# Altium PCB PCB.PcbDoc
Units mm, origin at the board's own origin, x right, y up, seen from the top; angles counter-clockwise.
Board outline 40 x 15 mm, 2 copper layers (Top Layer, Bottom Layer); 2 components, 16 nets, 38 pads, 6 vias.
Unrouted connection lines stored in the file: 10.
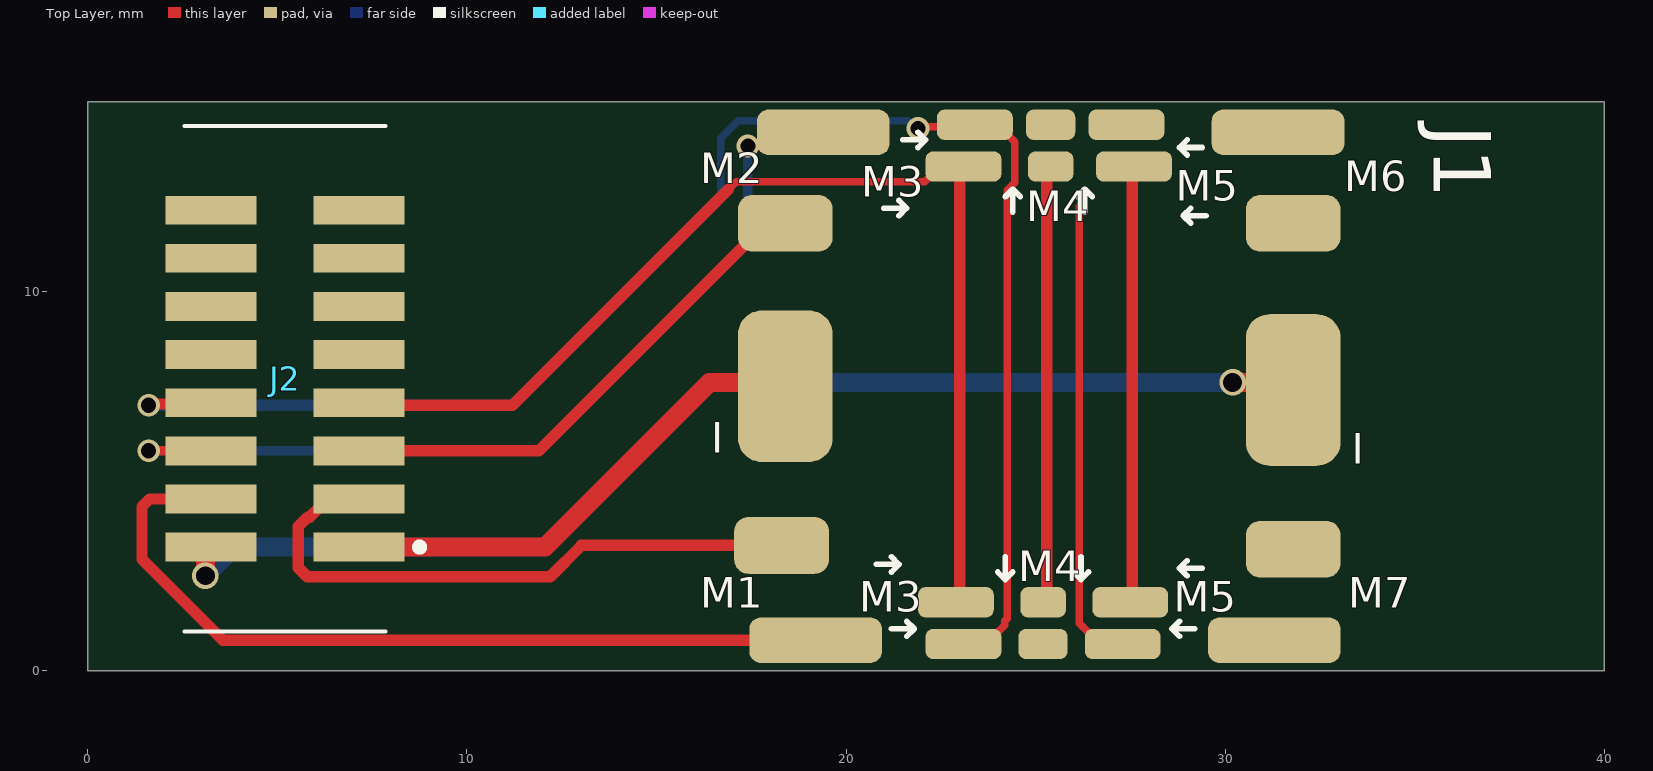
[diagram p0: Top Layer view]
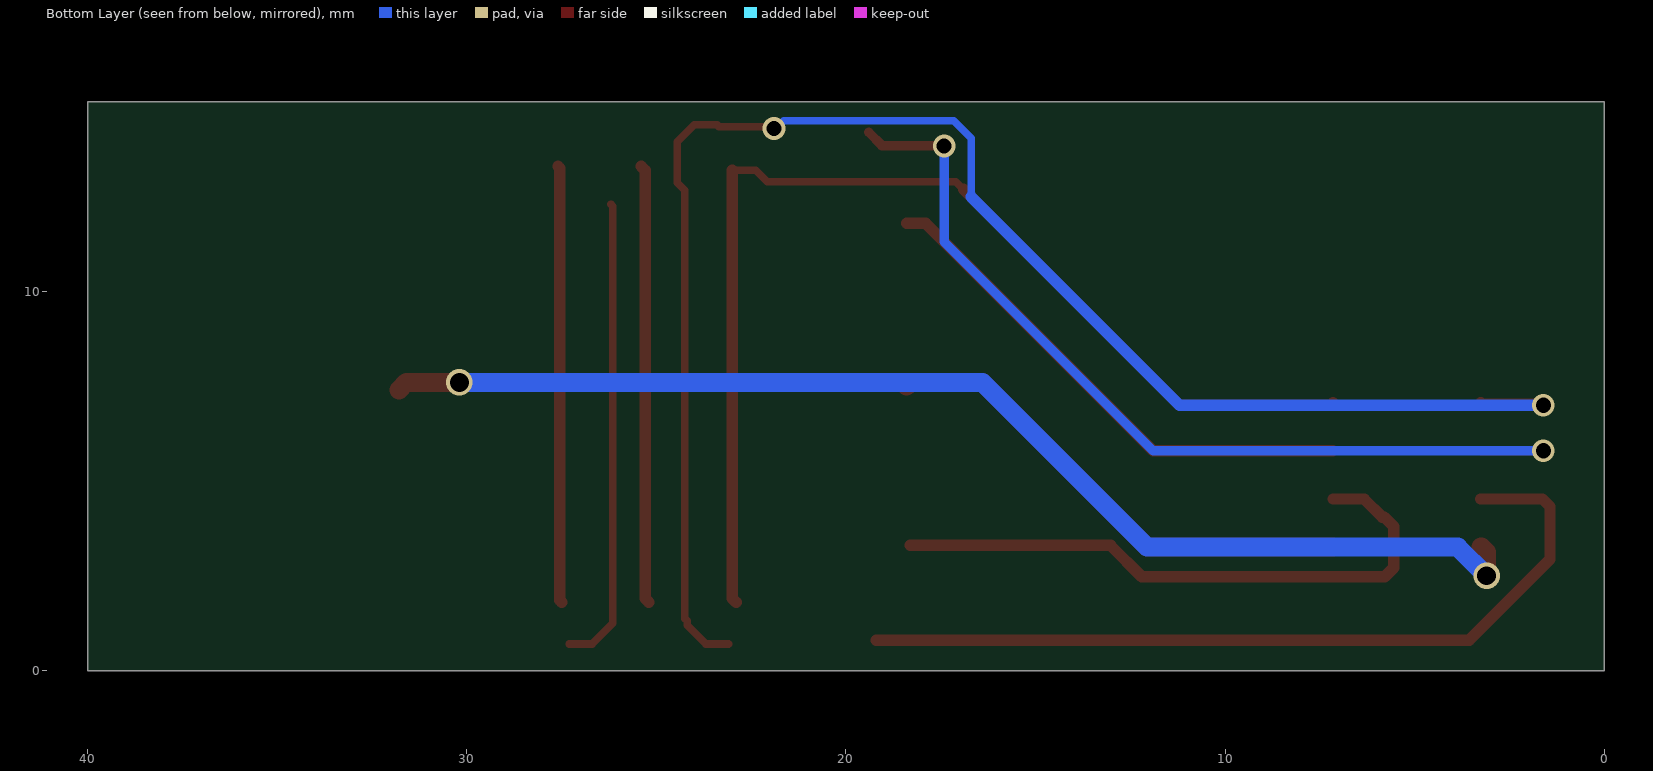
[diagram p1: Bottom Layer view, seen from below]

## Layer stack, top to bottom
Top Solder: solder mask 0.01, Solder Resist, Dk 3.5
Top Layer: signal copper 0.036
Dielectric 1: dielectric 0.32, FR-4, Dk 4.8
Bottom Layer: signal copper 0.036
Bottom Solder: solder mask 0.01, Solder Resist, Dk 3.5

## Board outline
0,0 40,0 40,15 0,15

## Design rules (kind name [scope] priority, off if disabled: settings)
Clearance [All] p1: gap=0.25 ignorepadtopadclearanceinfootprint=FALSE except(0: Arc-Hole Track-Hole SMDPad-Hole THPad-Hole Via-Hole Fill-Hole Poly-Hole Region-Hole Text-Hole)
HoleSize [All] p1: absolutevalues=TRUE maxlimit=6.3 minlimit=0.2 maxpercent=80.000 minpercent=20.000
MinimumAnnularRing [All] p1: minimumring=0.13
PolygonConnect [All] p1: connectstyle=Relief reliefconductorwidth=0.254 reliefentries=4 polygonreliefangle="90 Angle" airgapwidth=0.254
RoutingVias [All] p1: holewidth=0.3 width=0.6 viastyle="Through Hole" minholewidth=0.2 minwidth=0.45 maxholewidth=6.3 maxwidth=6.7
SolderMaskExpansion [All] p1: expansion=0.102 istentingtop=FALSE
Width [All] p1: maxlimit=0.5 minlimit=0.15 preferedwidth=0.3 minimp=50.000000 maximp=50.000000 favimp=50.000000
29 further rules are at their usual default settings.

## Classes and differential pairs
net class [1..16]: 1 2 3 4 5 6 7 8 9 10 11 12 13 14 15 16

## Components (designator, comment, footprint, x,y, rotation, side; value= is the part's Value field where it differs from the comment)
J1 "sample_contact_place" sample 25.1,7.4 r0 top
J2 "20021221-00016C4LF" 2002122100016C4LF 5.2,7.7 r270 top

## Footprints (in the part's own frame and the unit in brackets; to place one, negate y for a bottom-side part, rotate by r counter-clockwise, add the part's x,y. Pads: shape width x height; smd on the part's side, far side on the other; paste and mask are expansions set on the pad)
2002122100016C4LF [mm]
  rect 0.76x2.4 smd: 1(4.445,1.95) 2(4.445,-1.95) 3(3.175,1.95) 4(3.175,-1.95) 5(1.905,1.95) 6(1.905,-1.95) 7(0.635,1.95) 8(0.635,-1.95) 9(-0.635,1.95) 10(-0.635,-1.95) 11(-1.905,1.95) 12(-1.905,-1.95) 13(-3.175,1.95) 14(-3.175,-1.95) 15(-4.445,1.95) 16(-4.445,-1.95)
  silkscreen extent -6.67,-2.65 6.67,3.6, body extent -6.67,-3.07 6.67,3.07, height 5.9
sample [mm]
  rrect50% 2.5x4 smd: 1(-6.7,0.1) 2(6.7,0)
  rrect50% 2.5x1.5 smd: 3(-6.8,-4.1) 5(-6.7,4.4) 14(6.7,4.4) 16(6.7,-4.2)
  rrect50% 3.5x1.2 smd: 4(-5.9,-6.6) 6(-5.7,6.8) 13(6.3,6.8) 15(6.2,-6.6)
  rrect50% 2x0.8 smd: 7(-2.2,-5.6) 7(-2,5.9) 8(-2,-6.7) 8(-1.7,7) 11(2.4,-5.6) 11(2.5,5.9) 12(2.2,-6.7) 12(2.3,7)
  rrect50% 1.2x0.8 smd: 9(0.1,-5.6) 9(0.3,5.9)
  rrect50% 1.3x0.8 smd: 10(0.1,-6.7) 10(0.3,7)
  silkscreen extent -4.3,-6.5 4.4,6.8, body extent -5,-4.9 5,5.1, height 1

## Part data
J2: "Connector", Manufacturer_Name=Amphenol, Height=5.8mm, Manufacturer_Part_Number=20021221-00016C4LF

## Via types
v1: diameter 0.6, hole 0.4, Top Layer to Bottom Layer, 4 vias
v2: diameter 0.7, hole 0.5, Top Layer to Bottom Layer, 2 vias

## Nets (pads, with @x,y where several pads share a name; then routed paths per layer and width w, separated by ;. In a path a pad name is that pad's centre, name@x,y a point inside that pad or via, vN(x,y) a via of type N, cw(c..) or ccw(c..) an arc to the next point about the centre after c; other vN are vias at no path point)
1: J1.1 J2.1 | length 13.1
  Top Layer w0.5: J2.1 12.055,3.255 16.4,7.6 18.3,7.6 J1.1
2: J1.2 J2.2 | length 31.7
  Top Layer w0.5: v2(3.1,2.5) 3.1,3.125 3.23,3.255 J2.2 ; v2(30.2,7.6) 31.6,7.6 J1.2
  Bottom Layer w0.5: v2(3.1,2.5) 3.855,3.255 12.055,3.255 16.4,7.6 v2(30.2,7.6)
3: J1.3 J2.3 | length 16.2
  Top Layer w0.3: J2.3 6.33,4.525 5.853,4.048 5.797,4.048 5.55,3.801 5.55,2.709 5.784,2.475 12.194,2.475 13.019,3.3 J1.3
4: J1.4 J2.4 | length 22
  Top Layer w0.3: J2.4 1.625,4.525 1.424,4.324 1.424,2.935 3.559,0.8 J1.4
5: J1.5 J2.5 | length 13.7
  Top Layer w0.3: J2.5 11.895,5.795 17.9,11.8 J1.5
6: J1.6 J2.6 | length 24.5
  Top Layer w0.25: v1(1.6,5.8) 3.245,5.8 J2.6 ; v1(17.411,13.838) 17.522,13.727 17.645,13.851 19.051,13.851 J1.6
  Bottom Layer w0.25: v1(1.6,5.8) 1.605,5.795 11.895,5.795 17.411,11.311 v1(17.411,13.838)
7: J1.7 J2.7 | length 29.9
  Top Layer w0.2: 16.9,12.7 17.1,12.9 22.076,12.9 22.376,13.2 J1.7@23,13.2
  Top Layer w0.3: J2.7 7.215,7 11.2,7 16.9,12.7 ; J1.7@22.9,1.8 23,1.9 J1.7@23,13.2
8: J1.8 J2.8 | length 43
  Top Layer w0.2: v1(21.9,14.3) 21.95,14.35 23.35,14.35 23.4,14.4 24,14.4 24.45,13.95 24.45,13.728 24.45,12.872 24.25,12.672 24.25,1.372 24.194,1.316 24.194,1.194 23.7,0.7 J1.8@23.1,0.7
  Top Layer w0.3: v1(1.6,7) 1.632,7.033 3.217,7.033 J2.8
  Bottom Layer w0.2: 16.7,12.5 16.7,14.046 17.154,14.5 21.641,14.5 21.841,14.3 v1(21.9,14.3)
  Bottom Layer w0.3: v1(1.6,7) 11.2,7 16.7,12.5
9: J1.9 J2.9 | length 11.6
  Top Layer w0.3: J1.9@25.2,1.8 25.3,1.9 25.3,13.2 J1.9@25.4,13.3
10: J1.10 J2.10
11: J1.11 J2.11 | length 11.5
  Top Layer w0.3: J1.11@27.5,1.8 27.55,1.85 27.55,13.25 J1.11@27.6,13.3
12: J1.12 J2.12 | length 12.4
  Top Layer w0.2: 26.2,12.3 26.15,12.25 26.15,1.25 26.7,0.7 J1.12@27.3,0.7
13: J1.13 J2.13
14: J1.14 J2.14
15: J1.15 J2.15
16: J1.16 J2.16

## Text inside footprints (layer, text, board x,y; h text height)
J1: Top Overlay "M5" at 28.65,1.55 h0.8; Top Overlay "M7" at 33.25,1.65 h0.8; Top Overlay "M6" at 33.15,12.65 h0.8; Top Overlay "M4" at 24.75,11.85 h0.8; Top Overlay "M3" at 20.4,12.5 h0.8; Top Overlay "M1" at 16.15,1.65 h0.8; Top Overlay "M2" at 16.15,12.85 h0.8; Top Overlay "M3" at 20.35,1.55 h0.8; Top Overlay "M4" at 24.55,2.35 h0.8; Top Overlay "M5" at 28.7,12.4 h0.8; Top Overlay "I" at 16.45,5.75 h0.8; Top Overlay "I" at 33.35,5.45 h0.8